# Altium PCB Pcb.PcbDoc
Units mm, origin at the board's own origin, x right, y up, seen from the top; angles counter-clockwise.
Board outline 49.53 x 24.35 mm, 2 copper layers (Top Layer, Bottom Layer), stack 1.671 mm thick; 9 components, 6 nets, 27 pads, 8 vias.
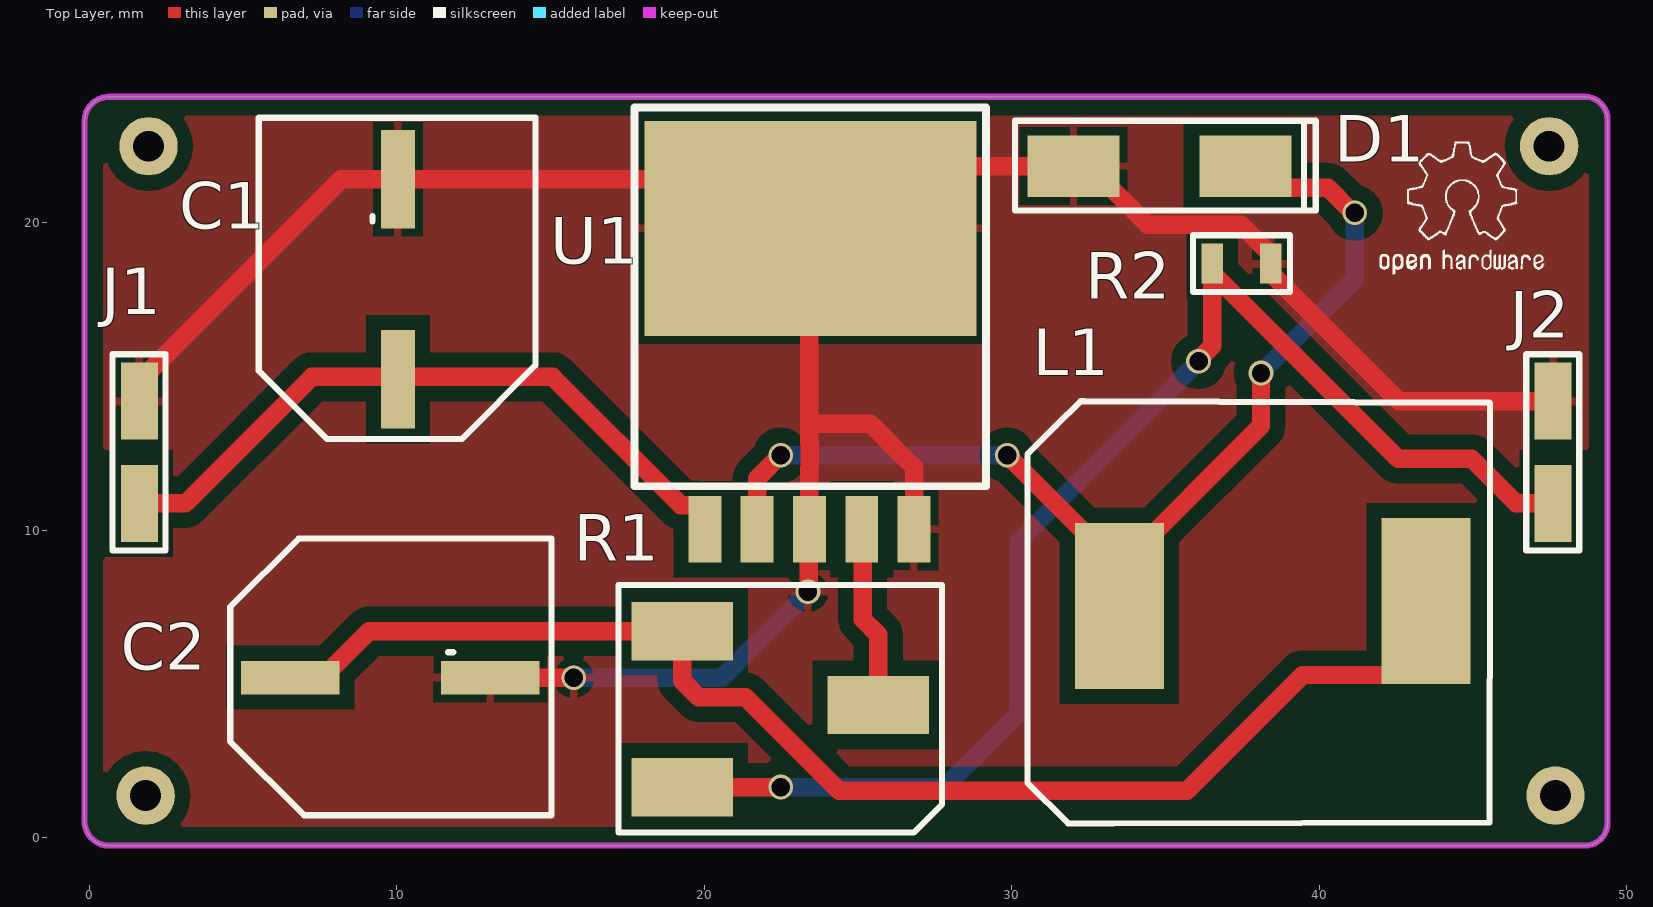
[diagram p0: Top Layer view]
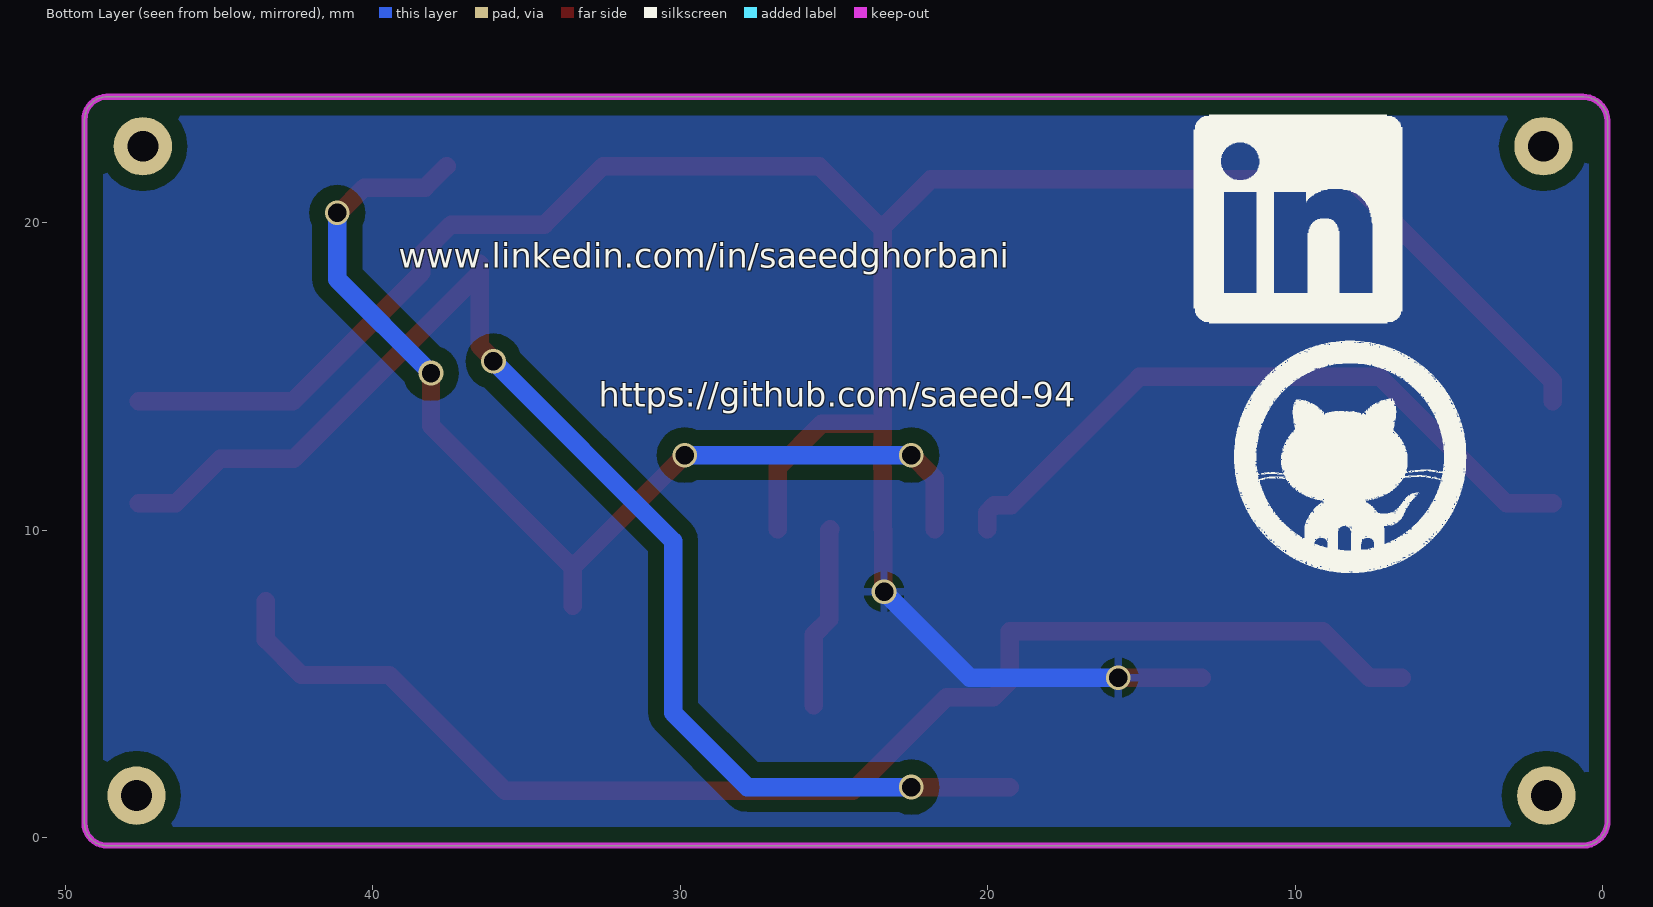
[diagram p1: Bottom Layer view, seen from below]
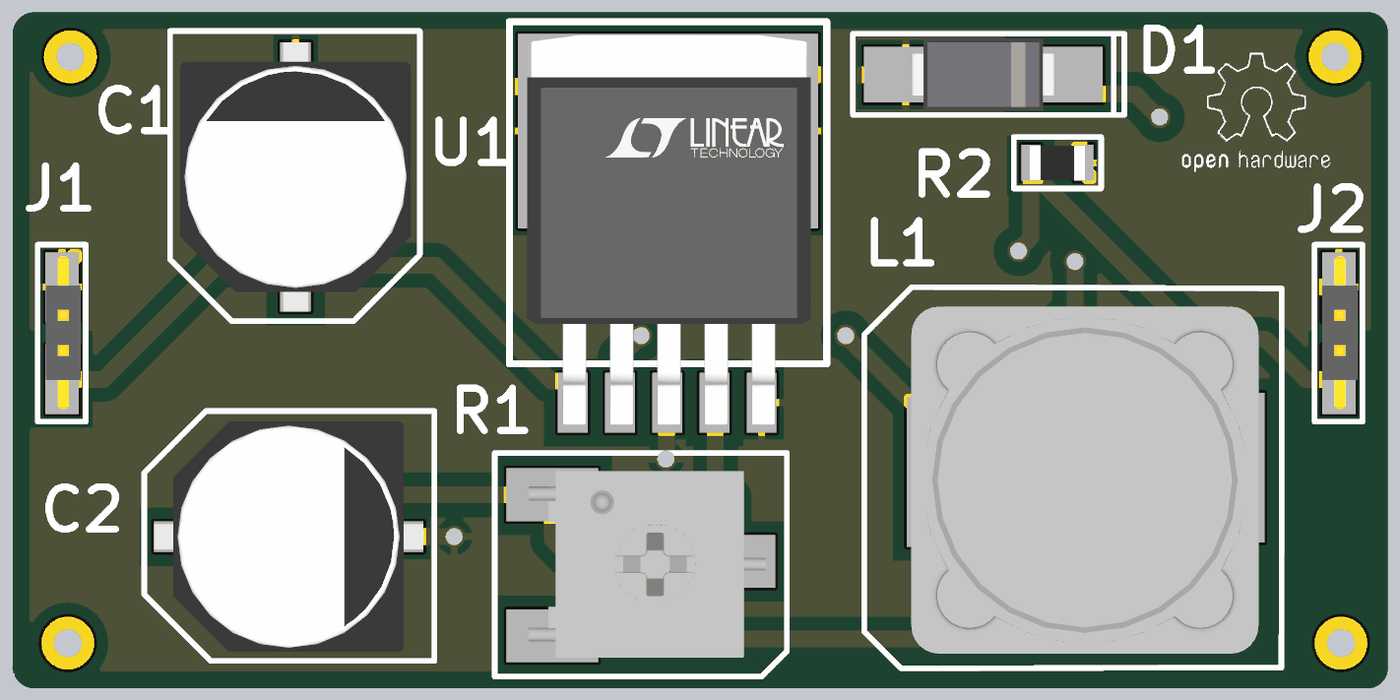
[diagram p2: 3D render of the assembled board from above, using the file's embedded part models]

## Layer stack, top to bottom
Top Solder: solder mask 0.0102, Solder Resist, Dk 3.5
Top Layer: signal copper 0.0356
Dielectric 1: dielectric 1.6, FR-4, Dk 4.8
Bottom Layer: signal copper 0.0356
Bottom Solder: solder mask 0.0102, Solder Resist, Dk 3.5

## Board outline
-0.158,0.571 ccw(c0.642,0.546) 0.617,-0.254 48.617,-0.254 ccw(c48.63,0.483) 49.367,0.471 49.367,0.521 49.367,14.046 49.367,23.346 ccw(c48.63,23.358) 48.642,24.096 0.667,24.096 ccw(c0.642,23.296) -0.158,23.321

## Design rules (kind name [scope] priority, off if disabled: settings)
Clearance Clearance_Polygan [InPolygon] p1: gap=0.5 ignorepadtopadclearanceinfootprint=FALSE
Clearance [All] p2: gap=0.25 ignorepadtopadclearanceinfootprint=FALSE
HoleSize [All] p1: absolutevalues=TRUE maxlimit=5 minlimit=0.1 maxpercent=80.000 minpercent=20.000
HoleToHoleClearance [All] p1: gap=0.2 allowstackedmicrovias=TRUE
MinimumSolderMaskSliver [All] p1: minsoldermaskwidth=0.1
PolygonConnect [All] p1: connectstyle=Relief reliefconductorwidth=0.254 reliefentries=4 polygonreliefangle="90 Angle" airgapwidth=0.254
RoutingVias [All] p1: holewidth=0.6 width=0.8 viastyle="Through Hole" minholewidth=0.5 minwidth=0.7 maxholewidth=1 maxwidth=2
SilkToSilkClearance [All] p1: silktosilkclearance=0.1
SilkToSolderMaskClearance [IsPad] p1: minsilkscreentomaskgap=0.1 clearancetoexposedcopper=TRUE
SolderMaskExpansion [All] p1: expansion=0.102 istentingtop=FALSE
Width [All] p1: maxlimit=1 minlimit=0.25 preferedwidth=0.3
25 further rules are at their usual default settings.

## Components (designator, comment, footprint, x,y, rotation, side; value= is the part's Value field where it differs from the comment)
C1 "200uF" "C_elec - duplicate" 10.033,18.415 r90 top
C2 "1000uF" "C_elec - duplicate" 10.033,5.207 r0 top
D1 "1N5822" "1N5822 - duplicate1" 34.671,21.844 r0 top
J1 "connector" 2PIN_Connector 1.651,12.573 r90 top
J2 "connector" 2PIN_Connector 47.625,12.573 r90 top
L1 "150uH" "150uH Indicator - duplicate" 38.481,7.62 r0 top
R1 "10k" "variabel resistor - duplicate" 19.279,6.718 r0 top
R2 "1K" R(0805) 37.465,18.669 r180 top
U1 "LM2576" "LM2576 - duplicate" 20.017,10.033 r90 top

## Footprints (in the part's own frame and the unit in brackets; to place one, negate y for a bottom-side part, rotate by r counter-clockwise, add the part's x,y. Pads: shape width x height; smd on the part's side, far side on the other; paste and mask are expansions set on the pad)
"1N5822 - duplicate1" [mm]
  rect 3x2 smd: 1(-2.667,0) 2(2.921,0)
  silkscreen extent -4.57,-1.45 5.21,1.47, body extent -2.47,-1.3 2.73,1.3, height 2.42
2PIN_Connector [mm]
  rect 2.5x1.2 smd: 1(-1.7,0.025) 2(1.625,0.025)
  silkscreen extent -3.22,-0.82 3.15,0.9, body extent -2.77,-0.65 2.72,0.62, height 4.51
"150uH Indicator - duplicate" [mm]
  rect 2.9x5.4 smd: 1(-4.987,-0.075) 2(4.988,0.075)
  silkscreen extent -7.98,-7.15 7.06,6.58, body extent -6.28,-6.62 6.23,5.88, height 7.51
"C_elec - duplicate" [mm]
  rect 3.2x1.1 smd: 1(-3.5,0) 2(3,0)
  silkscreen extent -5.45,-4.47 5,4.52, body extent -5.1,-4.15 4.6,4.15, height 8.51
"LM2576 - duplicate" [mm]
  rect 2.16x1.07 smd: 1(0,0) 2(0,-1.7) 3(0,-3.4) 4(0,-5.1) 5(0,-6.8)
  rect 7x10.8 smd: 3(9.779,-3.429)
  silkscreen extent 1.4,-9.14 13.72,2.29, body extent -0.8,-8.57 13.25,1.65, height 4.38
R(0805) [mm]
  rect 0.7x1.3 smd: 1(-0.95,0) 2(0.95,0)
  silkscreen extent -1.58,-0.92 1.58,0.92, body extent -1,-0.63 1,0.62, height 0.61
"variabel resistor - duplicate" [mm]
  rect 3.3x1.9 smd: 1(0,0) 2(6.375,-2.4) 3(0,-5.08)
  silkscreen extent -2.07,-6.55 8.45,1.5, body extent -0.85,-5.86 7.69,0.84, height 5.21

## Part data
C1 C2: library part cap_elec
J1 J2: library part 2PIN_Connector
R1: library part "variable Resistor"
R2: library part Res

## Free pads (board coordinates)
  round 1.9 hole 1: 7(1.831,1.374) 7(1.925,22.488) 7(47.467,22.488) 7(47.675,1.374)

## Via types
v1: diameter 0.8, hole 0.6, Top Layer to Bottom Layer, tented both sides, 8 vias

## Nets (pads, with @x,y where several pads share a name; then routed paths per layer and width w, separated by ;. In a path a pad name is that pad's centre, name@x,y a point inside that pad or via, vN(x,y) a via of type N, cw(c..) or ccw(c..) an arc to the next point about the centre after c; other vN are vias at no path point)
GND: C1.2 C2.2 D1.1 J1.2 J2.2 R2.1 U1.3 U1.5 | length 83.7
  Top Layer w0.6: J1.2 1.626,14.848 8.193,21.415 C1.2 21.843,21.415 U1.3@23.446,19.812 ; C2.2 v1(15.748,5.207) ; v1(23.368,8.001) 23.393,8.026 23.393,10.009 23.417,10.033 23.417,12.013 23.429,12.025 23.429,12.84 23.417,12.852 23.417,13.462 ; U1.5 26.817,12.045 25.4,13.462 23.417,13.462 ; J2.2 42.586,14.198 38.415,18.369 R2.1 38.415,18.969 37.445,19.939 34.409,19.939 32.504,21.844 D1.1 25.478,21.844 U1.3@23.446,19.812 ; 23.417,13.462 23.417,19.783 U1.3@23.446,19.812
  Bottom Layer w0.6: v1(15.748,5.207) 20.574,5.207 v1(23.368,8.001)
NetC1_1: C1.1 J1.1 U1.1 | length 22.5
  Top Layer w0.6: J1.1 3.126,10.873 7.239,14.986 15.064,14.986 19.237,10.813 19.782,10.813 20.017,10.578 U1.1
NetC2_1: C2.1 L1.2 R1.1 | length 43.9
  Top Layer w0.6: C2.1 7.583,5.207 9.094,6.718 R1.1 19.279,5.105 19.812,4.572 21.336,4.572 24.384,1.524 35.687,1.524 39.458,5.295 42.319,5.295 43.469,6.445 L1.2
NetD1_2: D1.2 L1.1 U1.2 | length 35.4
  Top Layer w0.6: U1.2 21.717,11.684 v1(22.479,12.446) ; v1(29.845,12.446) 29.972,12.319 29.972,12.317 L1.1@33.494,8.795 ; L1.1 L1.1@33.494,8.795 ; D1.2 38.292,21.144 40.27,21.144 41.094,20.32 v1(41.148,20.32) ; v1(38.1,15.113) 38.1,13.401 L1.1@33.494,8.795
  Bottom Layer w0.6: v1(22.479,12.446) v1(29.845,12.446) ; v1(38.1,15.113) 41.148,18.161 v1(41.148,20.32)
NetJ2_1: J2.1 R1.3 R2.2 | length 43.4
  Top Layer w0.6: R1.3 22.466,1.638 v1(22.479,1.651) ; v1(36.068,15.494) 36.068,15.548 36.515,15.995 R2.2@36.515,18.369 ; R2.2 R2.2@36.515,18.369 ; J2.1 46.404,10.873 44.958,12.319 42.565,12.319 R2.2@36.515,18.369
  Bottom Layer w0.6: v1(22.479,1.651) 27.813,1.651 30.226,4.064 30.226,9.652 v1(36.068,15.494)
NetR1_2: R1.2 U1.4 | length 5.9
  Top Layer w0.6: U1.4 25.146,10.004 25.146,7.112 25.654,6.604 R1.2

## Polygon pours and split planes (outlines as drawn)
GND on Top Layer "GND_L01_P000" (solid, remove dead copper, pour order 0): -0.2,-0.3 -0.2,24.1 -0.1,24.2 49.4,24.2 49.4,-0.3
GND on Bottom Layer "GND_L02_P001" (solid, remove dead copper, pour order 1): -0.256,-0.162 -0.2,-0.106 -0.2,24.3 49.4,24.3 49.5,24.2 49.5,-0.3 0,-0.3 -0.2,-0.1

## Keep-outs
Keep-Out Layer:
  lines w0.2: 0.642,24.096 48.642,24.096 cw(c48.63,23.358) 49.367,23.346 49.367,14.046 49.367,0.521 ; 0.667,24.096 ccw(c0.642,23.296) -0.158,23.321 -0.158,14.096 -0.158,0.571 ccw(c0.642,0.546) 0.617,-0.254 48.617,-0.254 ccw(c48.63,0.483) 49.367,0.471

## Silkscreen, mask and mechanical layers (free items; w line width, h text height)
Top Overlay:
  drawing of 13 lines, arcs and shapes, not listed
Bottom Overlay:
  drawing of 2 lines, arcs and shapes, not listed
  text "www.linkedin.com/in/saeedghorbani" at 39.15,18.542 h0.8
  text "https://github.com/saeed-94" at 32.65,14.017 h0.8